# Altium PCB 搅拌杯PCB.PcbDoc
Units mil, origin at the board's own origin, x right, y up, seen from the top; angles counter-clockwise.
Board outline 1417.32 x 1279.53 mil, 2 copper layers (Top Layer, Bottom Layer); 89 components, 50 nets, 211 pads, 61 vias.
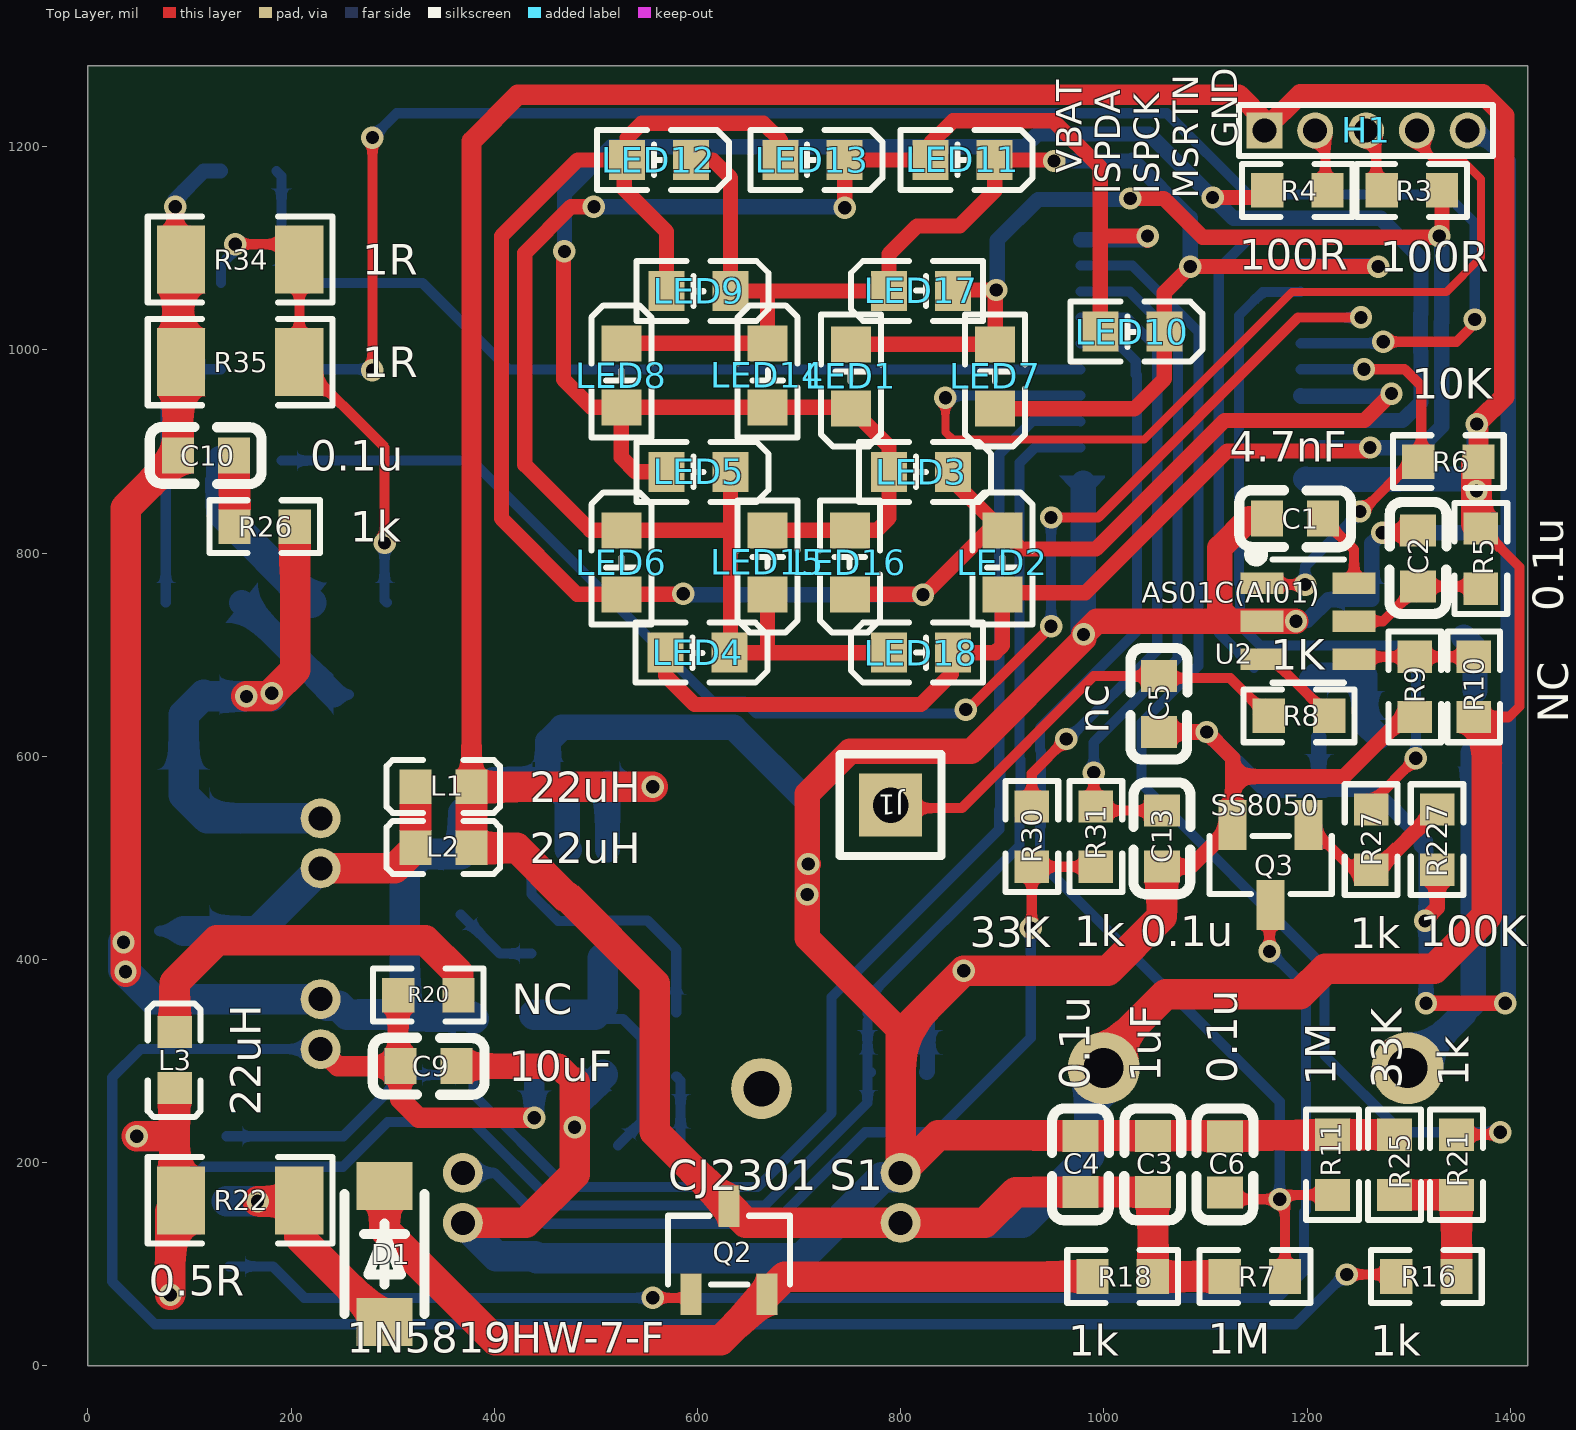
[diagram p0: Top Layer view]
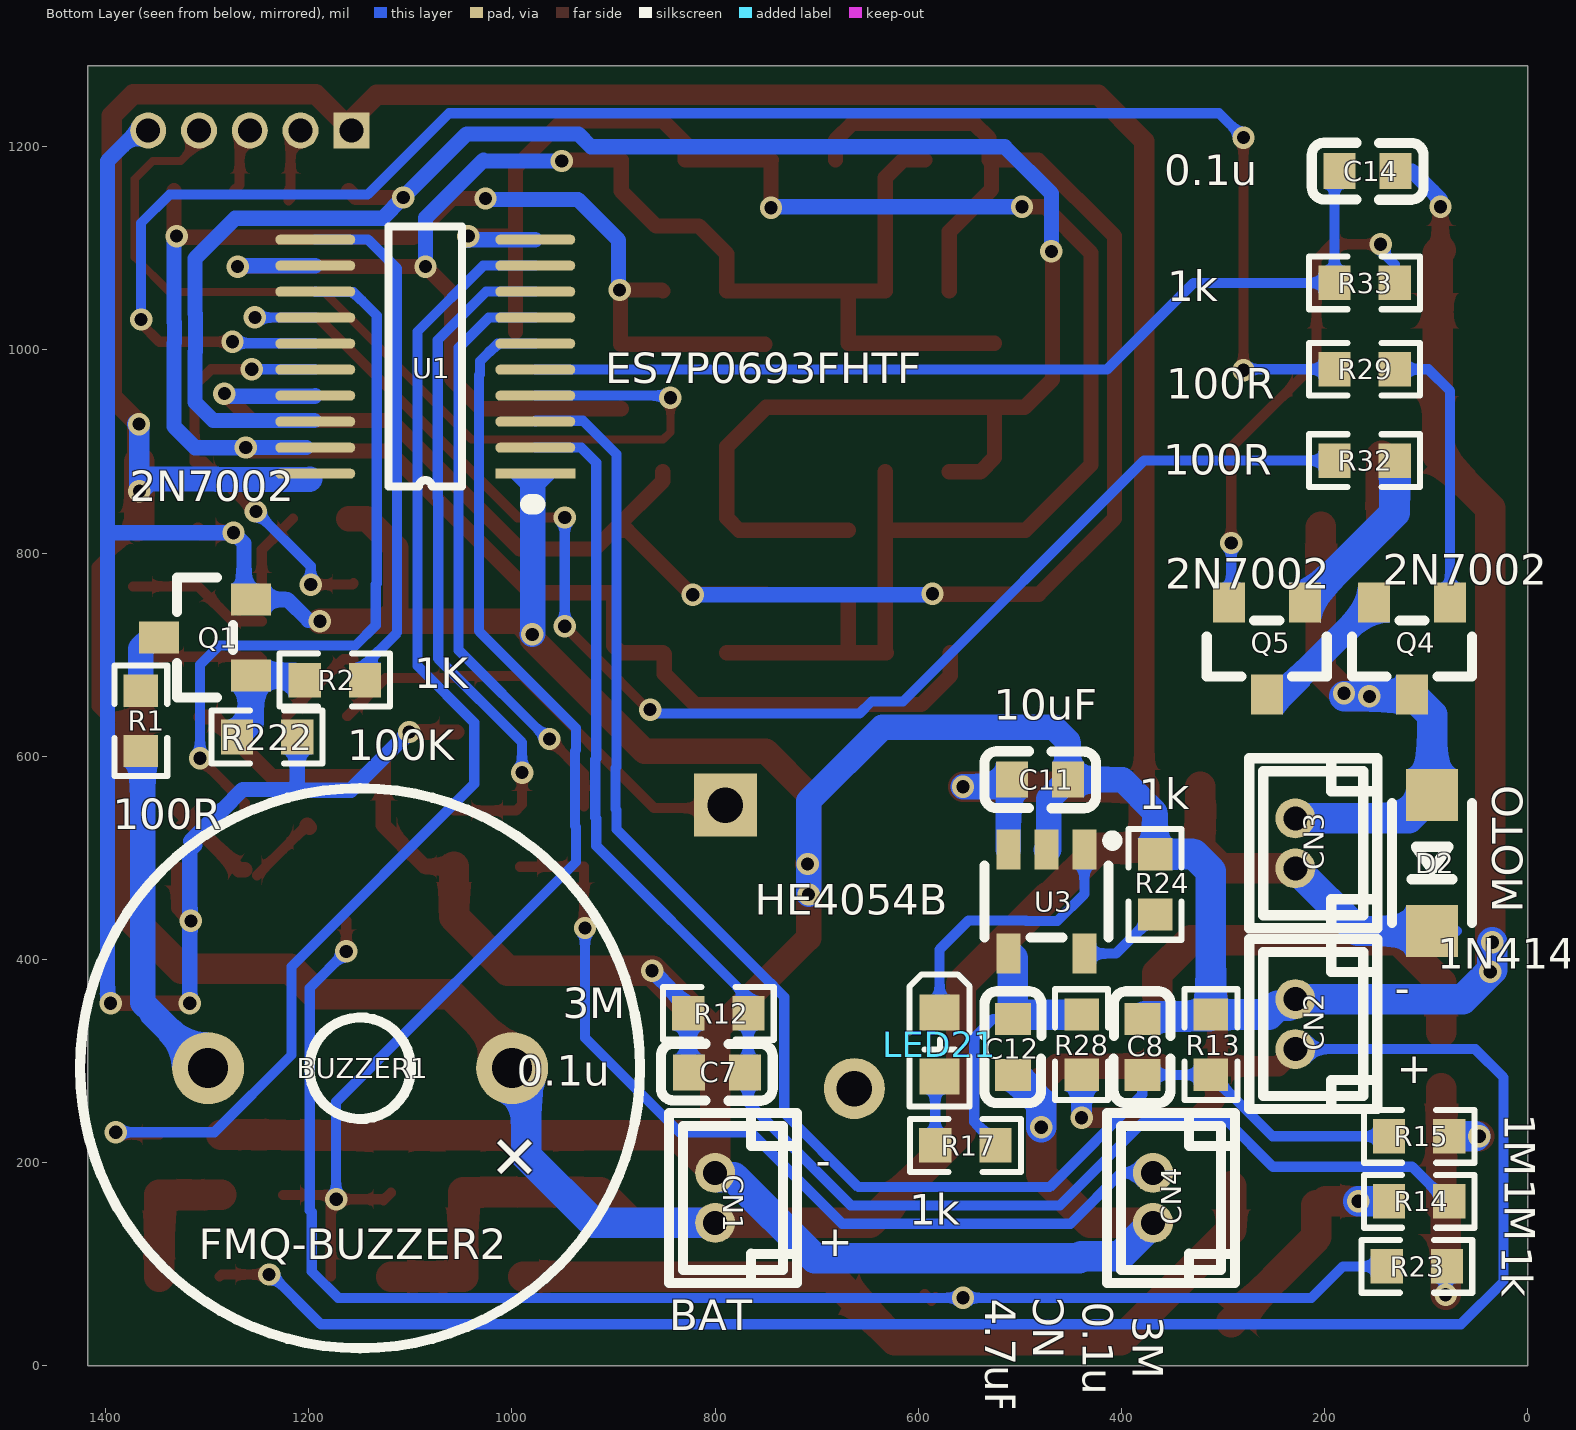
[diagram p1: Bottom Layer view, seen from below]

## Layer stack, top to bottom
Top Solder: solder mask 0.4, Solder Resist, Dk 3.5
Top Layer: signal copper 1.4
Dielectric 1: dielectric 12.6, FR-4, Dk 4.8
Bottom Layer: signal copper 1.4
Bottom Solder: solder mask 0.4, Solder Resist, Dk 3.5

## Board outline
0,0 0,1279.53 1417.32,1279.53 1417.32,0

## Design rules (kind name [scope] priority, off if disabled: settings)
Clearance [All] p1: gap=8
ComponentClearance [All] p1 off: gap=10 collisioncheckmode=3 verticalgap=10 showdistances=FALSE
PolygonConnect [All] p1: connectstyle=Relief reliefconductorwidth=10 reliefentries=4 polygonreliefangle="90 Angle" airgapwidth=10
RoutingVias [All] p1: holewidth=28 width=50 viastyle="Through Hole" minholewidth=10 minwidth=10 maxholewidth=28 maxwidth=50
SolderMaskExpansion [All] p1: expansion=4
Width [All] p1: maxlimit=50 minlimit=8 preferedwidth=10
29 further rules are at their usual default settings.

## Components (designator, comment, footprint, x,y, rotation, side; value= is the part's Value field where it differs from the comment)
BUZZER1 "FMQ-BUZZER2" BUZ-TH_BD12.0-P7.60-D0.6-FD 1149.39,293 r0 bottom
C1 "4.7nF" C0603 1188,834 r180 top
C2 "0.1u" C0603 1309,794.85 r270 top
C3 "1uF" C0603 1048.11,198.66 r90 top
C4 "0.1u" C0603 977,198.66 r90 top
C5 "nc" C0603 1054,651.44 r270 top
C6 "0.1u" C0603 1119,198.06 r270 top
C7 "0.1u" C0603 798,289 r180 bottom
C8 "0.1u" C0603 379.58,314 r90 bottom
C9 "10uF" C0603 335,295 r180 top
C10 "0.1u" C0603 116.24,896 r0 top
C11 "10uF" C0603 480.3,577 r0 bottom
C12 "4.7uF" C0603 506.85,314 r90 bottom
C13 "0.1u" C0603 1057,519 r270 top
C14 "0.1u" C0603 158,1176 r0 bottom
CN1 "0530470210" CONN-TH_0530470210 800,165.39 r90 bottom
CN2 "0530470210" CONN-TH_0530470210 229,336.39 r90 bottom
CN3 "0530470210" CONN-TH_0530470210 229,514.39 r90 bottom
CN4 "0530470210" CONN-TH_0530470210 369,165.39 r90 bottom
D1 "1N5819HW-7-F" SOD-123_L2.8-W1.8-LS3.7-FD 292,110 r90 top
D2 "1N4148W" SOD-123FL_L2.6-W1.6-LS3.4-RD 94.32,495 r270 bottom
H1 "HDR-F-2.54_1x5" 1.27MM_5PIN 1158,1216 r0 top
J1 "HDR-M-2.54_1x1" HDR-M-2.54_1X1 790,552 r0 top
L1 "22uH" L0603 350,570 r0 top
L2 "22uH" L0603 350,510 r0 top
L3 "22uH" L0603 85.28,301 r90 top
LED1 "LED-0603_W" LED0603-FD_WHITE 751,973.99 r270 top
LED2 "LED-0603_W" LED0603-FD_WHITE 900,791 r90 top
LED3 "LED-0603_W" LED0603-FD_WHITE 820,880 r0 top
LED4 "LED-0603_W" LED0603-FD_WHITE 600,702 r0 top
LED5 "LED-0603_W" LED0603-FD_WHITE 601,880 r0 top
LED6 "LED-0603_W" LED0603-FD_WHITE 525,791 r90 top
LED7 "LED-0603_W" LED0603-FD_WHITE 893,973.99 r270 top
LED8 "LED-0603_W" LED0603-FD_WHITE 525,975 r90 top
LED9 "LED-0603_W" LED0603-FD_WHITE 601,1058 r0 top
LED10 "LED-0603_W" LED0603-FD_WHITE 1028,1018 r0 top
LED11 "LED-0603_W" LED0603-FD_WHITE 861,1187 r0 top
LED12 "LED-0603_W" LED0603-FD_WHITE 562,1187 r0 top
LED13 "LED-0603_W" LED0603-FD_WHITE 713,1187 r0 top
LED14 "LED-0603_W" LED0603-FD_WHITE 669,975 r90 top
LED15 "LED-0603_W" LED0603-FD_WHITE 669,790.99 r270 top
LED16 "LED-0603_W" LED0603-FD_WHITE 750,790.99 r270 top
LED17 "LED-0603_W" LED0603-FD_WHITE 820,1058 r180 top
LED18 "LED-0603_W" LED0603-FD_WHITE 819.99,702 r180 top
LED21 "LED-0603_W" LED0603-FD_WHITE 579,316.5 r90 bottom
Q1 "2N7002" SOT-23_L2.9-W1.3-P0.95-LS2.4-BR 1302,717 r180 bottom
Q2 "CJ2301 S1" SOT-23-3_L3.0-W1.7-P0.95-LS2.9-BR 631,114 r270 top
Q3 "SS8050" SOT-23-3_L2.9-W1.3-P1.90-LS2.4-BR 1164.15,493 r90 top
Q4 "2N7002" SOT-23_L2.9-W1.3-P0.95-LS2.4-BR 114,706 r90 bottom
Q5 "2N7002" SOT-23_L2.9-W1.3-P0.95-LS2.4-BR 257,706 r90 bottom
R1 "100R" R0603 1365.27,635 r90 bottom
R2 "1K" R0603 1174.34,675 r180 bottom
R3 "100R" R0603 1303,1157 r0 top
R4 "100R" R0603 1190.34,1157 r180 top
R5 "NC" R0603 1371,794.65 r90 top
R6 "10K" R0603 1339,890 r0 top
R7 "1M" R0603 1148.66,88 r180 top
R8 "1K" R0603 1192,639.84 r180 top
R9 "NC" R0603 1306,668.36 r90 top
R10 "NC" R0603 1364,668.36 r90 top
R11 "1M" R0603 1225,198 r270 top
R12 "3M" R0603 796.81,347 r180 bottom
R13 "3M" R0603 312,316.19 r90 bottom
R14 "1M" R0603 107,162 r180 bottom
R15 "1M" R0603 107,226 r0 bottom
R16 "1k" R0603 1317.34,88 r180 top
R17 "1k" R0603 553.65,217 r0 bottom
R18 "1k" R0603 1018.45,88 r0 top
R20 "NC" R0603 335,365 r0 top
R21 "1k" R0603 1347,198 r90 top
R22 "0.5R" R1206 149.9,163 r180 top
R23 "1k" R0603 109.35,98 r180 bottom
R24 "1k" R0603 367,474 r90 bottom
R25 "33K" R0603 1286,198 r90 top
R26 "1k" R0603 174,826 r0 top
R27 "1k" R0603 1263,518 r90 top
R28 "NC" R0603 439.27,316.19 r270 bottom
R29 "100R" R0603 160.8,981 r180 bottom
R30 "33K" R0603 929,521 r270 top
R31 "1k" R0603 992,521 r90 top
R32 "100R" R0603 160.8,891 r180 bottom
R33 "1k" R0603 160.8,1066 r0 bottom
R34 "1R" R1206 149.9,1089 r0 top
R35 "1R" R1206 149.9,988 r0 top
R222 "100K" R0603 1241,619 r180 bottom
R227 "100K" R0603 1328,518 r270 top
U1 "ES7P0693FHTF" TSOP20 977,878.23 r0 bottom
U2 "AS01C(AI01)" SOT-23-6_L2.9-W1.6-P0.95-LS2.8-BL 1201,733 r270 top
U3 "HE4054B" SOT-23-5_L3.0-W1.7-P0.95-LS2.8-BR 474,457 r90 bottom

## Footprints (in the part's own frame and the unit in brackets; to place one, negate y for a bottom-side part, rotate by r counter-clockwise, add the part's x,y. Pads: shape width x height; smd on the part's side, far side on the other; paste and mask are expansions set on the pad)
1.27MM_5PIN [mm]
  rect 0.9x0.9 hole 0.6: 1(0,0)
  round 0.9 hole 0.6: 2(1.27,0) 3(2.54,0) 4(3.81,0) 5(5.08,0)
  silkscreen extent -0.64,-0.64 5.71,0.64
BUZ-TH_BD12.0-P7.60-D0.6-FD [mm]
  round 1.8 hole 1: 1(-3.8,0) 2(3.8,0)
  silkscreen extent -7,-7 7,7
C0603 [mm]
  rect 0.8x0.9 smd: 1(-0.7,0) 2(0.7,0)
  silkscreen extent -1.41,-0.71 1.39,0.72
CONN-TH_0530470210 [mm]
  round 1 hole 0.6: 1(-0.625,0) 2(0.625,0)
  silkscreen extent -2.13,-2.05 2.13,1.15
HDR-M-2.54_1X1 [mil]
  rect 62x62 hole 35: 1(0,0)
  silkscreen extent -50,-50 50,50
L0603 [mm]
  rect 0.8x0.864 smd: 1(-0.7,0) 2(0.7,0)
  silkscreen extent -1.42,-0.65 1.41,0.67
LED0603-FD_WHITE [mm]
  rect 0.9x1 smd: 1(-0.8,0) 2(0.8,0)
  silkscreen extent -1.55,-0.75 1.75,0.75
R0603 [mil]
  rect 31.75x34.02 smd: 1(-29.65,0) 2(29.65,0)
  silkscreen extent -55,-26 55,26
R1206 [mil]
  rect 47.54x66.97 smd: 1(-58.22,0) 2(58.22,0)
  silkscreen extent -91,-42 91,42
SOD-123_L2.8-W1.8-LS3.7-FD [mm]
  rect 1.2x1.4 smd: 1(-1.7,0) 2(1.7,0)
  silkscreen extent -1.5,-1 1.5,1
SOD-123FL_L2.6-W1.6-LS3.4-RD [mm]
  rect 1.3x1.3 smd: 1(1.7,0) 2(-1.7,0)
  silkscreen extent -1.5,-1 1.5,1
SOT-23-3_L2.9-W1.3-P1.90-LS2.4-BR [mm]
  rect 1.25x0.7 smd: 1(1,-0.95) 2(1,0.95) 3(-1,0)
  silkscreen extent -0.73,-1.53 0.73,1.53
SOT-23-3_L3.0-W1.7-P0.95-LS2.9-BR [mm]
  rect 1.037x0.532 smd: 1(1.101,-0.95) 2(1.101,0.95) 3(-1.101,0)
  silkscreen extent -0.86,-1.53 0.86,1.53
SOT-23-5_L3.0-W1.7-P0.95-LS2.8-BR [mm]
  rect 1x0.6 smd: 1(1.3,-0.95) 2(1.3,0) 3(1.3,0.95) 4(-1.3,0.95) 5(-1.3,-0.95)
  silkscreen extent -0.9,-1.78 1.65,1.55
SOT-23-6_L2.9-W1.6-P0.95-LS2.8-BL [mm]
  rect 0.532x1.072 smd: 1(-0.95,-1.149) 2(0,-1.149) 3(0.95,-1.149) 4(0.95,1.149) 5(0,1.149) 6(-0.95,1.149)
  silkscreen extent -1.82,-1.45 1.54,0.89
SOT-23_L2.9-W1.3-P0.95-LS2.4-BR [mm]
  rect 1x0.8 smd: 1(1.15,-0.95) 2(1.15,0.95) 3(-1.15,0)
  silkscreen extent -0.7,-1.5 0.7,1.5
TSOP20 [mm]
  rect 2x0.25 smd: 1(0,0)
  oval 2x0.25 smd: 2(0,-0.65) 3(0,-1.3) 4(0,-1.95) 5(0,-2.6) 6(0,-3.25) 7(0,-3.9) 8(0,-4.55) 9(0,-5.2) 10(0,-5.85) 11(5.5,-5.85) 12(5.5,-5.2) 13(5.5,-4.55) 14(5.5,-3.9) 15(5.5,-3.25) 16(5.5,-2.6) 17(5.5,-1.95) 18(5.5,-1.3) 19(5.5,-0.65) 20(5.5,0)
  silkscreen extent 0,-6.18 3.66,0.76

## Part data
R6: library part NC
R7: library part 430k
R11: library part 430K
R12 R13 R14 R15: library part 1k
R222 R227: library part 1K

## Free pads (board coordinates)
  round 60 hole 35: 2(663,273)

## Via types
v1: diameter 22, hole 13, Top Layer to Bottom Layer, tented both sides, 55 vias
v2: diameter 22, hole 13, Top Layer to Bottom Layer, 6 vias

## Nets (pads, with @x,y where several pads share a name; then routed paths per layer and width w, separated by ;. In a path a pad name is that pad's centre, name@x,y a point inside that pad or via, vN(x,y) a via of type N, cw(c..) or ccw(c..) an arc to the next point about the centre after c; other vN are vias at no path point)
BUZZER: R2.2 U1.11 | length 499.7
  Bottom Layer w10: R2.2@1147.69,687.03 1113,721.72 1113,1080 1141.55,1108.55 U1.11
CHARGE_CHA: C7.2 R12.2 R14.2 U1.2 | length 1553.3
  Bottom Layer w10: R14.2 80,162 113.99,195.99 250.99,195.99 295,240 378.49,240 460.49,158 666.46,158 767.35,258.89 C7.2@767.35,289 ; R12.2 767.15,362.15 917,512 917,538.72 918,539.72 918,596.95 917,597.95 917,889 931.82,903.82 U1.2 ; R12.2@767.35,340 C7.2@767.35,289 ; C7.2 C7.2@767.35,289
CHARGE_CHB: C8.1 R13.1 R15.2 U1.3 | length 1519.2
  Bottom Layer w10: R15.2 251.46,226 R13.1 312.09,286.44 C8.1 379.58,267.19 470.78,176 659,176 732,249 732,363.06 738.28,369.33 738.28,369.39 745.89,377.01 745.95,377.01 897,528.06 897,547 898,548 898,588.66 897,589.66 897,897.28 930,930.28 976.13,930.28 U1.3
CHARGE_CONTROL: R27.2 U1.13 | length 725.3
  Top Layer w10: R27.2 1263,554 v1(1307,598)
  Bottom Layer w10: U1.13 1193.18,1057 1156.15,1057 1133,1033.85 1133,770.19 1134,769.19 1134,729 1154,709 1288.14,709 1307,690.14 v1(1307,598)
GND: C1.2 C2.1 C3.2 C4.2 C5.2 C6.1 C7.1 C8.2 C9.1 C10.1 C11.1 C12.1 C13.2 C14.1 CN1.2 CN2.2 CN4.1 H1.5 Q1.2 Q3.2 R9.1 R11.1 R12.1 R13.2 R24.2 R25.2 R34.1 R35.1 R222.2 R227.2 U1.1 U2.2 U3.2 | length 7393.1
  Top Layer w15: R34.1@86,1098 v1(86,1141) ; C5.2 v2(1101.11,623.89) 1126.75,598.25 1126.75,580.25 ; C13.2 1085.83,491.44 Q3.2 1126.75,580.25 ; v1(1274,820) 1306.59,820 C2.1 ; R9.1 1294.71,638.71 1236.25,580.25 1126.75,580.25 ; v2(1316,438) 1315,438 1328,451 R227.2 ; v1(1317,357) v1(1395,357)
  Top Layer w25: C9.1 463.29,295 479,279.29 ; v2@708,494 708,563 750,605 869.55,605 980,715.45 v1(980,720) 993,733 1122,733 ; v2(709,494) 708,493 v2(708,464) 708,421 800,329 ; C1.2 1143,834 1114.16,805.16 1114.16,743.6 1122,735.76 1122,733 ; v1(1189,733) U2.2 1122,733
  Top Layer w30: v1(37,388) 37,844.31 C10.1 88.69,1095.31 R34.1@86,1098 ; CN4.1 431,140.78 479,188.78 v1(479,235) 479,279.29 ; 800,329 800,327 ; C13.2 1057,442 1004,389 v1(862,389) 800,327 ; R25.2 R11.1 1224.34,227 837,227 CN1.2 800,327
  Bottom Layer w15: v1(86,1141) 86,1148 114,1176 C14.1 ; C7.1 826.46,289.91 R12.1 826.46,353.46 v1(862,389) ; v2(1101.11,623.89) 1158.34,566.65 1217,566.65 ; 1200.48,734 1220.88,754.4 Q1.2 1263.72,754.4 1263.72,809.72 v1(1274,820) 1395.59,820 1398,822.41 ; R222.2 1211.34,572.31 1217,566.65 ; v2(1316,438) v2@1317,439 ; v1(1317,357) v2@1317,439 ; H1.5@1368,1216 1398,1186 1398,822.41 ; v1(1395,357) 1398,360 1398,822.41 ; 1217,566.65 1217.69,567.35 1265,567.35 1285.5,546.85 1286.16,546.85 1316.24,516.76 1312,512.52 1317,507.52 v2@1317,439
  Bottom Layer w25: R24.2 367,545 399,577 C11.1 ; U3.2 471.6,508.18 471.6,558.14 C11.1 ; v2(708,464) 708,556 635.5,628.5 466.5,628.5 452.74,614.74 C11.1 ; 979.5,869 979.5,720.5 v1(980,720)
  Bottom Layer w30: v1(35,417) 35,390 v1(37,388) 64,361 CN2.2 235.54,354.46 246.68,354.46 255.3,345.85 R13.2 313.85,344 377.14,344 C8.2 ; R13.2@312,361 312,487 328.65,503.65 R24.2 ; CN4.1 401.78,108 439.78,108 441.78,106 702.03,106 781.49,185.46 795.46,185.46 CN1.2 ; v1(479,235) 479,258.59 C12.1
IO_OUT: R30.1 U1.7 | length 591.5
  Top Layer w10: R30.1 929,583 v1(963,617)
  Bottom Layer w10: v1(963,617) 965,617 1052.46,704.46 1052.46,1002.09 1022.78,1031.77 U1.7
ISPCK: H1.3 R3.1 | length 61.2
  Top Layer w10: H1.3@1268,1216 1268,1162.34 R3.1
ISPDA: H1.2 R4.1 | length 62.7
  Top Layer w10: R4.1@1218,1149 R4.1@1220,1147 ; H1.2@1218,1216 1218,1159 R4.1
LED_IO_0: LED1.1 LED2.1 LED4.1 LED7.1 LED17.1 LED18.1 R3.2 U1.19 | length 1994.4
  Top Layer w15: LED4.1 568.5,679.5 597,651 820,651 850,681 850,700.51 LED18.1 893,702 900,709 LED2.1 901.5,761 981.82,761 1121.32,900.5 1259.03,900.5 v1@1262.35,903.82 ; LED1.1 LED7.1 v1@893,1050 ; LED17.1 852.5,1059 v1(894,1059) ; v1(1026,1149) 1059,1149 1097,1111 1329,1111 v1(1330,1112) 1332.66,1114.66 R3.2
  Bottom Layer w15: v1@895,1067 895,1108 935,1148 1025,1148 v1(1026,1149) ; U1.19@1202.08,904 v1(1262,904) v1@1269,904 ; v1@1261.95,903.82 v1@1269.18,903.82 ; v1(1330,1112) 1332.5,1109.5 1332.5,1027.44 1332,1026.94 1332,1007.06 1332.5,1006.56 1332.5,924.5 1311.82,903.82 v1@1269.18,903.82 ; v1@1269,904 v1@1269.18,903.82 ; v1@1269,904 1269.36,904 v1@1269.18,903.82
LED_IO_1: LED1.2 LED3.1 LED5.1 LED8.1 LED14.1 LED15.1 LED16.1 R4.2 U1.18 | length 2067.3
  Top Layer w15: v1(469,1097) 468,1096 468,971 495.5,943.5 LED8.1 ; LED5.1 539,880 525,894 LED8.1 ; LED15.1 LED16.1 776.49,822.49 788.5,834.5 LED3.1 788.5,905 LED1.2 750,943.5 LED14.1 LED8.1 ; v1(1107,1150) 1153.69,1150 R4.2
  Bottom Layer w15: v1(469,1097) 469,1154 515,1200 922.06,1200 934.56,1212.5 1044.5,1212.5 v1(1107,1150) 1127.5,1129.5 1272.5,1129.5 1312,1090 1312,1035.93 1311.5,1035.43 1311.5,998.57 1312,998.07 1312,948.52 1293.98,930.5 U1.18@1194.63,930.5
LED_IO_2: LED2.2 LED3.2 LED6.1 LED9.1 LED12.1 LED13.1 LED16.2 U1.17 | length 2032
  Top Layer w15: LED9.1 569.5,1116.5 528,1158 528,1184.5 LED12.1 ; v1(586,760) 585.5,759.5 LED6.1 481.5,759.5 407,834 407,1112 482,1187 LED12.1 ; LED13.1 681.5,1206.5 665,1223 545,1223 530.5,1208.5 LED12.1 ; LED16.2 823.5,759.5 886.49,822.49 LED2.2 ; v1@822,758 v1(822,759) ; LED3.2 851.49,871 LED2.2 ; v1(1283,957) 1256.5,930.5 1118.79,930.5 992.29,804 918.49,804 LED2.2
  Bottom Layer w15: v1(586,760) 587,759 v1(822,759) v1@821,760 ; U1.17 1194.04,954.5 1280.5,954.5 v1(1283,957)
LED_IO_3: LED4.2 LED5.2 LED6.2 LED10.1 LED11.1 LED13.2 LED15.2 LED18.2 U1.10 | length 1787.4
  Top Layer w15: v1(498,1141) 475.52,1141 430,1095.48 430,887 494.51,822.49 LED6.2 632.49,822.49 ; LED5.2 632.49,822.49 ; LED15.2@669,753.5 669,702 ; v1(745,1140) 745,1186.49 LED13.2 LED11.1 829.5,1203.5 851.5,1225.5 950.5,1225.5 996.5,1179.5 996.5,1113 ; LED18.2 669,702 ; LED10.1 996.5,1113 ; v1@1043,1108 v1(1043,1112) 997.5,1112 996.5,1113 ; 632.49,822.49 632.49,703 LED4.2 669,702
  Bottom Layer w15: v1(498,1141) 742,1141 743,1142 v1(745,1140) ; U1.10 1039.55,1108.55 v1(1043,1112) v1@1043,1108
LED_IO_4: LED7.2 LED8.2 LED9.2 LED10.2 LED11.2 LED12.2 LED14.2 LED17.2 U1.12 | length 1539.6
  Top Layer w15: LED8.2 LED14.2 669,1058 ; LED12.2 615,1187 632.49,1169.51 LED9.2 669,1058 ; LED7.2 892.5,942 1029.96,942 1059.49,971.53 LED10.2 1059.49,1056.49 v2(1085,1082) v1(1270,1082) ; v1(951,1186) 950,1187 LED11.2 892.49,1156.49 858,1122 816,1122 788.51,1094.51 LED17.2 669,1058
  Bottom Layer w15: v1(951,1186) 1027,1186 1028,1187 1085,1130 v2(1085,1082) ; U1.12 1272.95,1082.95 1272,1082 v1(1270,1082)
MOTO_CONTROL_A: R29.1 U1.15 | length 1739.3
  Top Layer w10: v1(280,980) v1(280,1209) ; v1@1276.41,1006.59 v1(1275,1008) 1347,1008 1365,1026 v1(1365,1030)
  Bottom Layer w10: R29.1 279,981 v1(280,980) ; v1(280,1209) 304,1233 1062,1233 1142,1153 1336.94,1153 1365,1124.94 v1(1365,1030) ; U1.15 1193.95,1006.59 1273.59,1006.59 v1(1275,1008)
MOTO_CONTROL_B: R32.1 U1.14 | length 1449.5
  Top Layer w10: v1(864,646) 865.99,646 920.5,700.51 v1(948,728) ; v1(948,835) 994.3,835 1191.3,1032 v1(1253,1032)
  Bottom Layer w10: R32.1 378,891 615,654 646.06,654 658.06,642 860,642 v1(864,646) ; v1(948,728) v1(948,835) ; U1.14 1252.77,1031.77 v1(1253,1032)
MOTO_CURRERN: C14.2 R33.2 U1.5 | length 934
  Bottom Layer w10: C14.2 190.46,1171.1 R33.2 329,1066 414.41,980.59 U1.5
MSRTN: H1.4 U1.4 | length 941.5
  Top Layer w8: v1(844,953) 844,919 851.31,911.69 1039.69,911.69 1185,1057 1337,1057 1371.19,1091.19 1371.19,1168.32 1353.5,1186.01 1326,1186.01 1308,1204.01 H1.4
  Bottom Layer w8: v1@842,951 v1(844,953)
  Bottom Layer w10: v1@844,955 U1.4
NetBUZZER1_2: BUZZER1.2 R1.1 | length 415.7
  Bottom Layer w25: BUZZER1.2 1354.27,348.27 ; BUZZER1.2@1302,294 1354.27,346.27 1354.27,348.27 ; R1.1 1363.5,603.57 1363.5,357.5 1354.27,348.27
NetC1_1: C1.1 U2.6 | length 76.3
  Top Layer w10: C1.1 1246.24,803.32 U2.6
NetC2_2: C2.2 R5.1 U2.5 | length 141
  Top Layer w10: U2.5 1274.7,733 C2.2 R5.1@1373,767.3
NetC5_1: C5.1 J1.1 R8.2 | length 477.4
  Top Layer w10: J1.1@767,575 J1.1 793,549 860,549 990,679 C5.1 1054,677 1124.4,677 1161.56,639.84 R8.2
NetC10_2: C10.2 R26.1 | length 70.2
  Top Layer w30: C10.2 144.35,895.45 R26.1
NetC12_2: C12.2 R17.1 R28.1 U3.4 | length 367.9
  Bottom Layer w10: R28.1 443.57,341.56 C12.2 ; C12.2@506.85,353.85 C12.2 ; U3.4@506.85,401.27 U3.4 ; R17.1@521.62,217 545,240.38 545,323 526.44,341.56 C12.2
  Bottom Layer w30: R28.1 498.85,345.85 506.85,353.85 U3.4@506.85,401.27
NetCN3_1: CN3.1 D2.1 L1.1 L2.1 | length 346.4
  Top Layer w30: CN3.1 302.22,489.78 L2.1 L1.1
  Bottom Layer w10: D2.1@70,428.07 D2.1
  Bottom Layer w30: D2.1 167.29,428.07 CN3.1
NetCN3_2: CN3.2 D2.2 Q4.3 R26.2 | length 518.8
  Top Layer w30: v1(156,659) 178,659 v1(181,662) 204,685 204,825.65 R26.2
  Bottom Layer w30: v1@181,659 v1(156,659) 115.73,659 Q4.3 94.32,641.04 D2.2 117.24,539 CN3.2
NetCN4_2: CN4.2 R30.2 R31.1 | length 886.9
  Top Layer w10: v1@929,431 R30.2 R31.1
  Bottom Layer w10: CN4.2 400.21,190 450.21,140 675,140 765,230 835,230 928,323 v1(928,431)
NetD1_1: D1.1 R14.1 R22.1 | length 217.7
  Top Layer w30: v1(167,162) 199,162 R22.1@203,158 ; R22.1@208.12,158 208.12,126.95 D1.1
  Bottom Layer w30: R14.1 v1(167,162)
NetD1_2: D1.2 Q2.2 R18.1 | length 810.8
  Top Layer w30: D1.2 292,134 400.78,25.22 622.98,25.22 Q2.2 685.76,88 R18.1
NetL3_1: L3.1 R15.1 R22.2 R23.2 | length 301.4
  Top Layer w30: v1(48,226) 81.28,226 85.28,222 ; v1(81,70) 81,152.32 85.28,156.6 85.28,222 ; L3.1 85.28,222
  Bottom Layer w10: R23.2 75.69,94 81,88.69 v1(81,70)
  Bottom Layer w30: v1@52,226 R15.1
NetL3_2: L3.2 R20.2 | length 380.3
  Top Layer w30: L3.2 85.28,377.28 127,419 332,419 364.65,386.35 R20.2
NetLED21_1: LED21.1 R17.2 | length 69.8
  Bottom Layer w10: LED21.1 583.31,280.69 R17.2
NetLED21_2: LED21.2 U3.1 | length 271.1
  Bottom Layer w10: U3.1 436.6,464.4 463,438 493.71,438 494.21,438.5 550.5,438.5 579,410 LED21.2
NetQ1_1: Q1.1 R2.1 R222.1 | length 121
  Bottom Layer w25: R2.1 1208.59,679.59 Q1.1 1256.72,632.93 R222.1
NetQ1_3: Q1.3 R1.2 | length 56.9
  Bottom Layer w25: Q1.3@1354.27,717 1365.27,706 R1.2
NetQ2_1: Q2.1 Q3.3 R23.1 | length 1485.3
  Top Layer w10: v1(556,67) 581.95,67 582.95,68 586.95,64 Q2.1 ; v1(1163,408) Q3.3@1163,438.48
  Bottom Layer w10: R23.1 182,98 213,67 v1(556,67) 1171,67 1197,93 1197,151.23 1199,153.23 1199,372 v1(1163,408)
NetQ3_1: Q3.1 R27.1 R227.1 | length 162.7
  Top Layer w10: Q3.1 R27.1@1250.92,483
  Top Layer w15: Q3.1@1199.19,530 Q3.1 ; R27.1 1268.69,488.35 R227.1
NetQ4_1: Q4.1 R29.2 | length 271.7
  Bottom Layer w10: Q4.1 76.59,959.59 98,981 R29.2
NetQ4_2: Q4.2 Q5.3 | length 143.1
  Bottom Layer w10: Q5.3@241.95,660.73 Q5.3
  Bottom Layer w25: Q4.2 Q5.3@241.95,660.73
NetQ5_1: Q5.1 R32.2 | length 176.4
  Bottom Layer w30: R32.2 131.15,839.72 Q5.1
NetQ5_2: Q5.2 R33.1 R34.2 R35.2 | length 486.5
  Top Layer w10: v1(145,1104) 193.12,1104 R34.2 R35.2 292,904.12 v1(292,810)
  Bottom Layer w10: R33.1 131.15,1084.15 145,1098 v1(145,1104) ; v1(292,810) 292,753.68 Q5.2
NetR8_1: R8.1 U2.3 | length 89
  Top Layer w10: U2.3 1165.9,695.6 R8.1
NetR9_2: R9.2 R10.2 U2.4 | length 118.8
  Top Layer w10: U2.4 1248.66,698.02 R9.2 R10.2
NetR16_1: R16.1 R21.1 R25.1 | length 141.3
  Top Layer w30: R25.1 R21.1 R16.1
NetR24_1: R24.1 U3.5 | length 85.6
  Bottom Layer w10: R24.1 405.53,405.81 U3.5
NTC_IN: C13.1 R31.2 U1.8 | length 676.8
  Top Layer w10: v1(990,584) 990,552.65 R31.2 996.1,546.56 C13.1
  Bottom Layer w10: U1.8 1025.48,1057.36 1073,1009.84 1073,854.09 1072.46,853.55 1072.46,696.18 990,613.72 v1(990,584)
TOUCH_IN: R6.1 U1.16 U2.1 | length 418.2
  Top Layer w10: U2.1 1157.17,769 v1(1198,769) ; v1(1252,841) 1254,841 1303,890 R6.1 1312.34,890 1312.34,964.66 1296,981 v1(1256,981)
  Bottom Layer w10: U1.16 1193.95,981 v1(1256,981) ; v1(1198,769) 1198,787 v1(1252,841)
USB_CHECK: R21.2 U1.9 | length 1208.2
  Top Layer w10: R21.2 1387.66,227.65 v1(1390,230) v1@1383,230
  Bottom Layer w10: U1.9 1028.16,1082.96 1093,1018.12 1093,689 1037,633 1037,573 1217,393 1217,306 1293,230 v1(1390,230)
USB_IN: C9.2 CN2.1 R16.2 R20.1 R28.2 | length 2090.9
  Top Layer w10: v1(1239,90) 1285.69,90 R16.2
  Top Layer w20: CN2.1 245.78,295 C9.2 ; R20.1 305.35,297.1 C9.2 ; v1(439.27,244.27) 325.73,244.27 307.44,262.56 C9.2
  Bottom Layer w10: CN2.1 51.78,311.78 24,284 24,83 66,41 1188,41 1238,91 v1(1239,90)
  Bottom Layer w20: v1(439.27,244.27) R28.2
VBAT: BUZZER1.1 C3.1 C4.1 C11.2 CN1.1 H1.1 L1.2 L2.2 Q2.3 R5.2 R6.2 R7.2 R10.1 R18.2 U1.20 U3.3 | length 5003.7
  Top Layer w10: R10.1 1398.71,638.71 1409,649 1409,786.31 R5.2 R5.2@1368.66,826.65
  Top Layer w20: L1.2 377.56,1205.55 423,1251 1133,1251 1158,1226 H1.1@1158,1216.72 ; H1.1 H1.1@1158,1216.72 ; v2(1367,927) v2@1368.66,928.66 ; R6.2 v2@1368.66,928.66 ; H1.1@1158,1216.72 1193,1251.72 1372.79,1251.72 1394,1230.51 1394,954 v2@1368.66,928.66
  Top Layer w30: v1(556.01,570.01) L1.2 L2.2 421.99,510.01 470,462 472,462 558,376 558,230.36 Q2.3 647.58,140.78 CN1.1 882.78,140.78 913.11,171.11 C4.1 C3.1 R18.2 R7.2 ; BUZZER1.1@994.79,300 1060.79,366 1193,366 1218,391 1325,391 1377,443 1377,625.71 R10.1 ; R6.2@1366.66,890 v1(1366.66,861) 1366.66,828.65 R5.2@1368.66,826.65
  Bottom Layer w10: C11.2 511.4,573.45 C11.2@514.85,570.01
  Bottom Layer w20: 1354.66,873 v1(1366.66,861) 1366.66,924.66 1369,927 v2(1367,927)
  Bottom Layer w25: U3.3 C11.2@511.4,573.45 ; C11.2@514.85,570.01 v1(556.01,570.01) ; 1198.77,873 1199.27,872.5 1290.23,872.5 1290.73,873 1354.66,873
  Bottom Layer w30: CN1.1 919.78,140.78 985.79,206.79 985.79,291 BUZZER1.1@997,302.21
VBAT_IN: C6.2 R7.1 R11.2 U1.6 | length 1215.2
  Top Layer w10: C6.2 1126.5,163 1127.5,164 v1(1173,164) ; R7.1 1178.31,164.31 1174.28,168.35 R11.2
  Bottom Layer w10: U1.6 1014.03,1006.18 1031.37,988.84 1031.37,976.09 1032.46,975 1032.46,723.23 937,627.77 937,606.23 938,605.23 938,531.43 937,530.43 937,496 1173,260 v1(1173,164)

## Other copper
Bottom Layer:
  region net GND: 956,876 967,865 992,865 1001,874 1001,876

## Silkscreen, mask and mechanical layers (free items; w line width, h text height)
Top Overlay:
  text "GND" at 1131,1198.98 h25 r90
  text "VBAT" at 978,1173.99 h25 r90
  text "ISPDA" at 1016.25,1153.17 h25 r90
  text "ISPCK" at 1054.5,1153.17 h25 r90
  text "MSRTN" at 1092.75,1149 h25 r90
Bottom Overlay:
  text "MOTO" at 5,446 h30 r270
  text "-" at 131,357 h30
  text "USB" at -266,296 h30 r270
  text "+" at 129,278 h30
  text "-" at 701,187 h30
  text "+" at 699,108 h30
  text "BAT" at 845,35 h30
Mechanical 1:
  circle w10: c717.34,421.29 r157.48
  lines w10: 9.25,591.09 1426.57,591.09 ; 8.68,0 8.68,1279.53 1426,1279.53 1426,0 8.68,0 ; 518.13,758.9 518.13,817.95 547.65,817.95 547.65,758.9 518.13,758.9 ; 518.13,941.98 518.13,1001.03 547.65,1001.03 547.65,941.98 518.13,941.98 ; 537.22,1172.74 537.22,1202.26 596.28,1202.26 596.28,1172.74 537.22,1172.74 ; 575.21,687.78 575.21,717.31 634.27,717.31 634.27,687.78 575.21,687.78 ; 575.21,865.2 575.21,894.73 634.27,894.73 634.27,865.2 575.21,865.2 ; 575.21,1042.62 575.21,1072.15 634.27,1072.15 634.27,1042.62 575.21,1042.62 ; 661.83,758.9 661.83,817.95 691.35,817.95 691.35,758.9 661.83,758.9 ; 661.83,941.98 661.83,1001.03 691.35,1001.03 691.35,941.98 661.83,941.98 ; 686.83,1172.74 686.83,1202.26 745.88,1202.26 745.88,1172.74 686.83,1172.74 ; 743.32,758.9 743.32,817.95 772.85,817.95 772.85,758.9 743.32,758.9 ; 743.32,941.98 743.32,1001.03 772.85,1001.03 772.85,941.98 743.32,941.98 ; 800.41,687.78 800.41,717.31 859.46,717.31 859.46,687.78 800.41,687.78 ; 800.41,865.2 800.41,894.73 859.46,894.73 859.46,865.2 800.41,865.2 ; 800.41,1042.62 800.41,1072.15 859.46,1072.15 859.46,1042.62 800.41,1042.62 ; 836.43,1172.74 836.43,1202.26 895.49,1202.26 895.49,1172.74 836.43,1172.74 ; 887.02,758.9 887.02,817.95 916.55,817.95 916.55,758.9 887.02,758.9 ; 887.02,941.98 887.02,1001.03 916.55,1001.03 916.55,941.98 887.02,941.98 ; 1002.77,1002.68 1002.77,1032.78 1062.22,1032.78 1062.22,1002.68 1002.77,1002.68

## Text inside footprints (layer, text, board x,y; h text height)
BUZZER1: Bottom Overlay "+" at 992.08,241.18 h50 r135